# EAGLE board espduino-12-panel (EAGLE 7.1.0), part 1 of 2
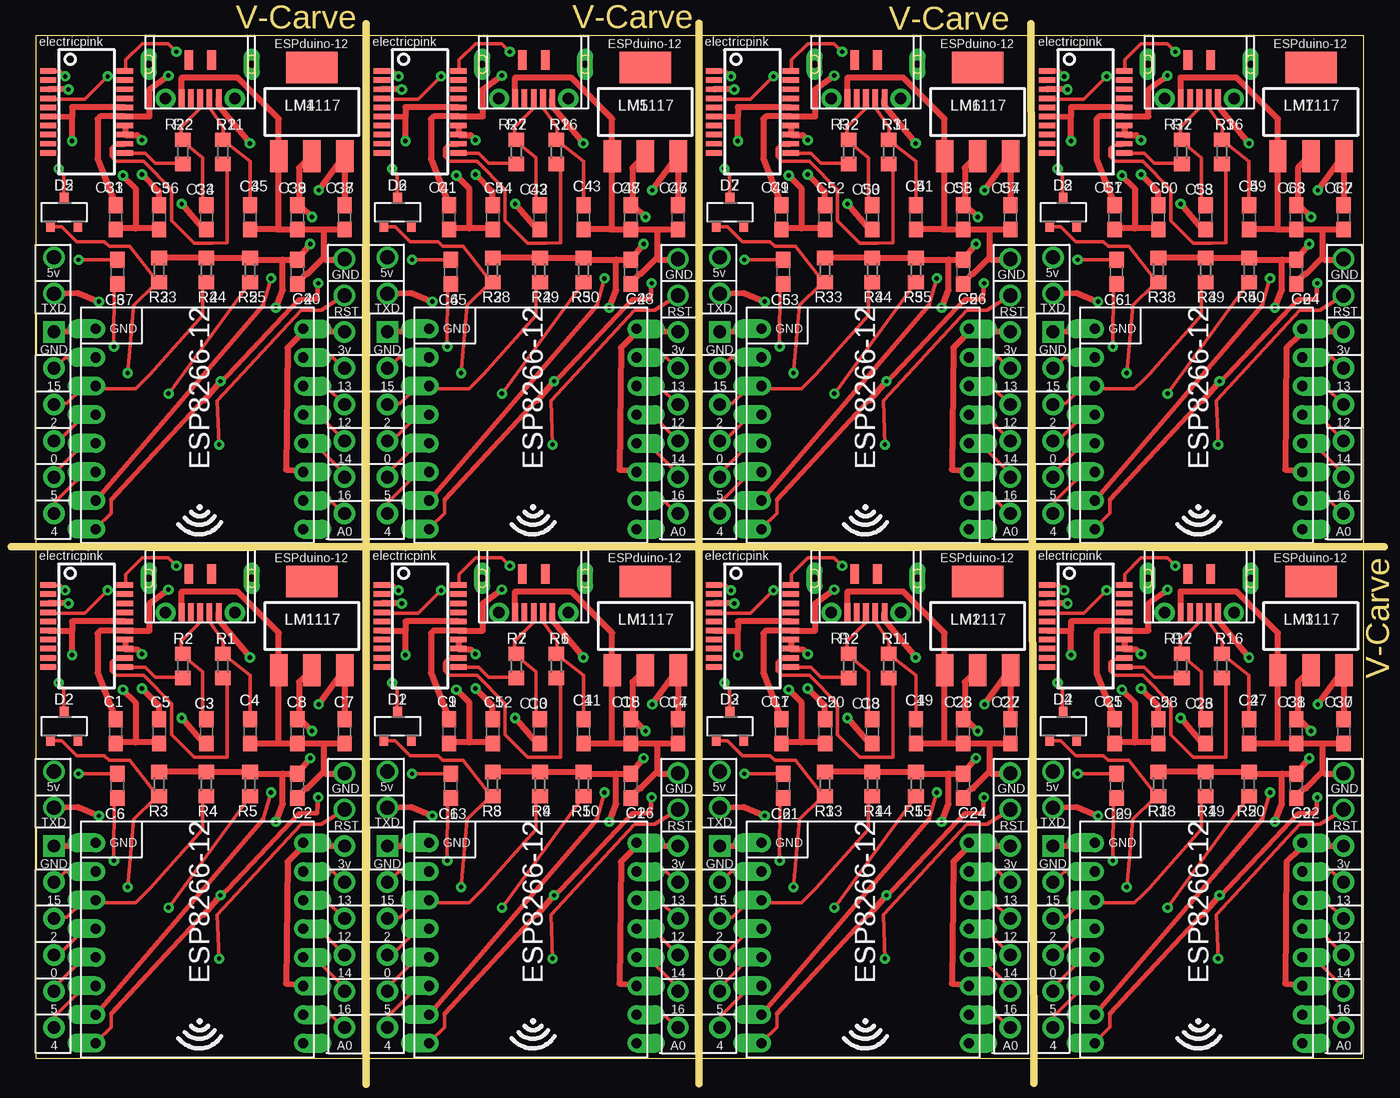
[diagram p0: board, top side]
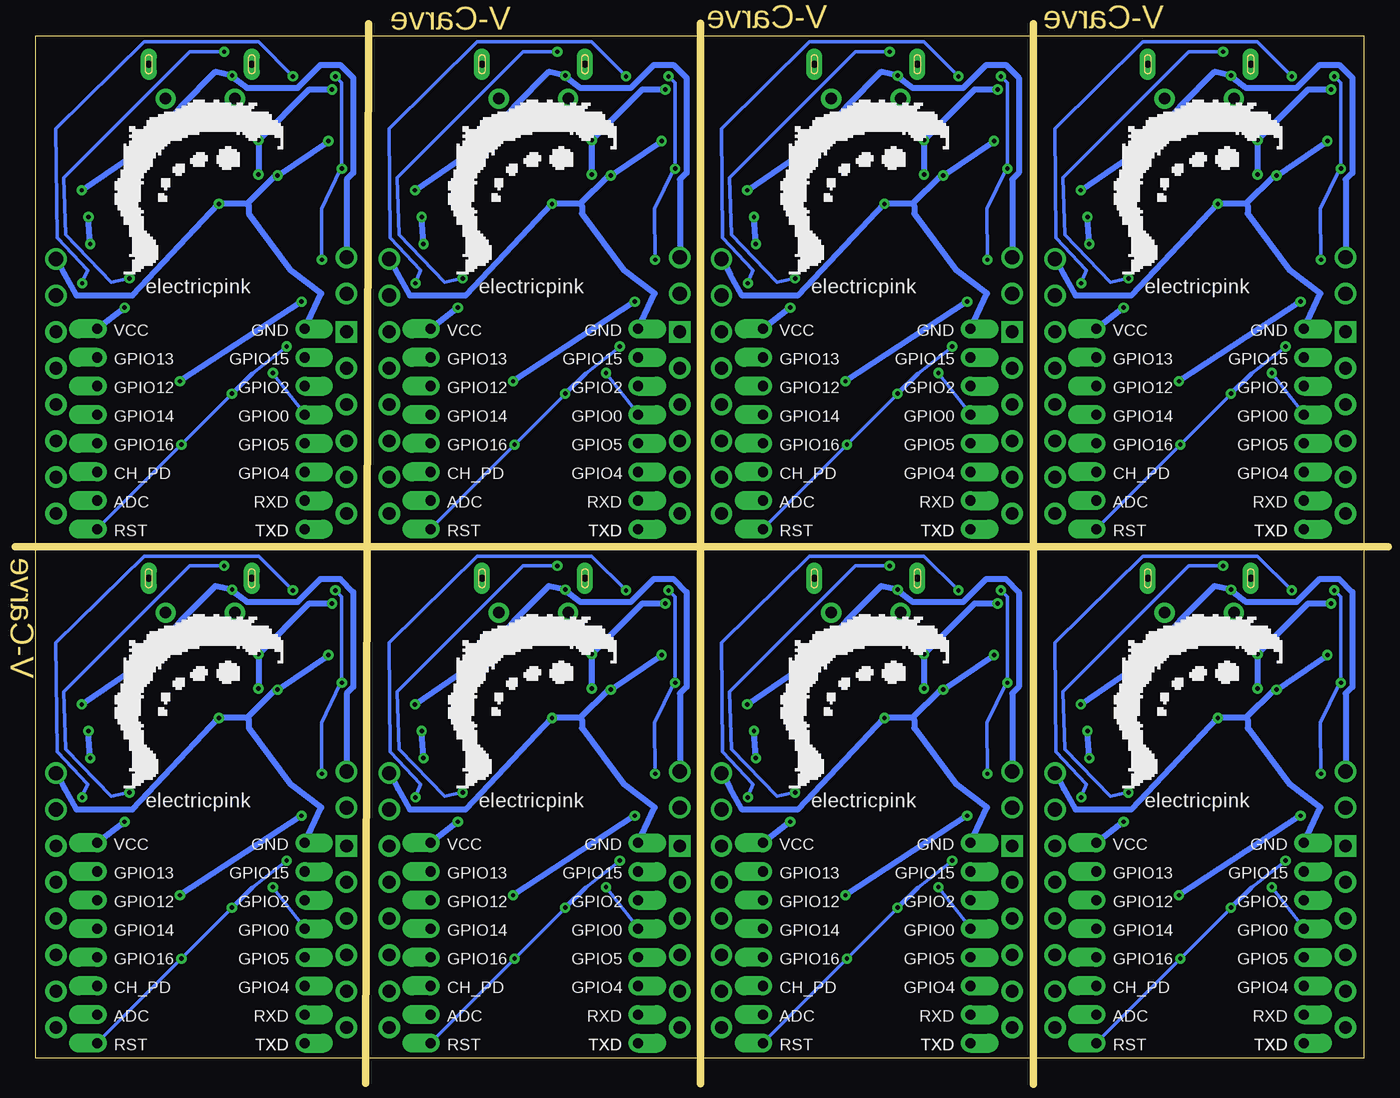
[diagram p1: board, bottom side, seen from below]

Size 92.84 x 71.48 mm. Coordinates in mm from the lower left corner, seen from the top.
Outline: 0,0 92.84,0 92.84,71.48 0,71.48 0,0
Copper layers (1*16): Top 0.035mm / dielectric 1.5mm / Bottom 0.035mm
Design rules "SeeedStudio_2layer_conservative": minimum track width 8mil, minimum drill 12mil, track to track 8mil, track to pad 8mil, pad to pad 8mil, via to via 8mil, smd to smd 0mil, copper to edge 12mil, drill to drill 12mil, minimum pad ring 12mil, minimum via ring 8mil, stop-mask expansion 2mil, vias tented up to drill 100mil, thermal gap 12mil
Net classes: 0 default: width 0.254 mm; 1 POWER: width 0.406 mm
Milling: 4 lines

## Footprints (pad centres in the part's own frame; a part is rotated, then mirrored left to right if it is on the bottom)
C0603 = smd 1.1 x 1: 1 -0.85,0; 2 0.85,0
SOT23-R = smd 0.6 x 0.7: 1 -0.95,-1; 2 0.95,-1; 3 0,1
ESP8266-12-EXT-HEADERS = drill 0.711 pad 1.2 offset: ADC 2.895,11.791; CH_PD 2.895,9.791; GND 17.395,-0.209; GPIO0 17.395,5.791; GPIO2 17.395,3.791; GPIO4 17.395,9.791; GPIO5 17.395,7.791; GPIO12 2.895,3.791; GPIO13 2.895,1.791; GPIO14 2.895,5.791; GPIO15 17.395,1.791; GPIO16 2.895,7.791; RESET 2.895,13.791; RX 17.395,11.791; TX 17.395,13.791; VCC 2.895,-0.209 | drill 0.889 pad 1.5: ADC_P 0,12.7; GPIO0_P 20.32,7.62; GPIO2_P 20.32,5.08; GPIO4_P 20.32,12.7; GPIO5_P 20.32,10.16; GPIO12_P 0,5.08; GPIO13_P 0,2.54; GPIO14_P 0,7.62; GPIO15_P 20.32,2.54; GPIO_16_P 0,10.16; VCC_P 0,0 | drill 0.889 pad 1.5 square: GND_P 20.32,0
SOT223 = smd 1.219 x 2.235: 1 -2.311,-3.099; 2 0,-3.099; 3 2.311,-3.099 | smd 3.6 x 2.2: 4 0,3.099
R0603 = smd 1 x 1.1: 1 -0.85,0; 2 0.85,0
SSOP20_L = smd 0.381 x 1.143: 1 -2.857,-2.68; 2 -2.223,-2.68; 3 -1.587,-2.68; 4 -0.953,-2.68; 5 -0.318,-2.68; 6 0.318,-2.68; 7 0.953,-2.68; 8 1.587,-2.68; 9 2.223,-2.68; 10 2.857,-2.68; 11 2.857,2.68; 12 2.223,2.68; 13 1.587,2.68; 14 0.953,2.68; 15 0.318,2.68; 16 -0.318,2.68; 17 -0.953,2.68; 18 -1.587,2.68; 19 -2.223,2.68; 20 -2.857,2.68
MICRO-USB-A01SB141B1 = smd 0.4 x 1.25: D+ 0,-4.375; D- 0.65,-4.375; GND -1.3,-4.375; ID -0.65,-4.375; VCC 1.3,-4.375 | smd 0.6 x 1.35: P$1 -0.8,-1.7; P$2 0.8,-1.7 | drill 0.8: P$8 -2.425,-4.4; P$9 2.425,-4.4 | drill 0.5 pad 1.1 long: P$10 -3.6,-2; P$12 3.6,-2

## Placement (x,y rotation side)
C1  4.7uF  [C0603]  5.59,22.86 270 top
C2  10uF  [C0603]  18.29,19.05 270 top
C3  47pF  [C0603]  11.94,22.86 270 top
C4  47pF  [C0603]  14.99,22.86 270 top
C5  0.1uF  [C0603]  8.64,22.86 270 top
C6  0.1uf  [C0603]  5.71,19.05 90 top
C7  0.1uf  [C0603]  21.59,22.86 270 top
C8  0.1uf  [C0603]  18.29,22.86 270 top
C9  4.7uF  [C0603]  28.9,22.86 270 top
C10  47pF  [C0603]  35.25,22.86 270 top
C11  47pF  [C0603]  38.3,22.86 270 top
C12  0.1uF  [C0603]  31.95,22.86 270 top
C13  0.1uf  [C0603]  29.02,19.05 90 top
C14  0.1uf  [C0603]  44.9,22.86 270 top
C15  0.1uf  [C0603]  41.6,22.86 270 top
C16  10uF  [C0603]  41.6,19.05 270 top
C17  4.7uF  [C0603]  52.13,22.86 270 top
C18  47pF  [C0603]  58.48,22.86 270 top
C19  47pF  [C0603]  61.53,22.86 270 top
C20  0.1uF  [C0603]  55.18,22.86 270 top
C21  0.1uf  [C0603]  52.26,19.05 90 top
C22  0.1uf  [C0603]  68.14,22.86 270 top
C23  0.1uf  [C0603]  64.83,22.86 270 top
C24  10uF  [C0603]  64.83,19.05 270 top
C25  4.7uF  [C0603]  75.43,22.86 270 top
C26  47pF  [C0603]  81.78,22.86 270 top
C27  47pF  [C0603]  84.83,22.86 270 top
C28  0.1uF  [C0603]  78.48,22.86 270 top
C29  0.1uf  [C0603]  75.56,19.05 90 top
C30  0.1uf  [C0603]  91.43,22.86 270 top
C31  0.1uf  [C0603]  88.13,22.86 270 top
C32  10uF  [C0603]  88.13,19.05 270 top
C33  4.7uF  [C0603]  5.59,58.78 270 top
C34  47pF  [C0603]  11.94,58.78 270 top
C35  47pF  [C0603]  14.99,58.78 270 top
C36  0.1uF  [C0603]  8.64,58.78 270 top
C37  0.1uf  [C0603]  5.71,54.97 90 top
C38  0.1uf  [C0603]  21.59,58.78 270 top
C39  0.1uf  [C0603]  18.29,58.78 270 top
C40  10uF  [C0603]  18.29,54.97 270 top
C41  4.7uF  [C0603]  28.9,58.78 270 top
C42  47pF  [C0603]  35.25,58.78 270 top
C43  47pF  [C0603]  38.3,58.78 270 top
C44  0.1uF  [C0603]  31.95,58.78 270 top
C45  0.1uf  [C0603]  29.02,54.97 90 top
C46  0.1uf  [C0603]  44.9,58.78 270 top
C47  0.1uf  [C0603]  41.6,58.78 270 top
C48  10uF  [C0603]  41.6,54.97 270 top
C49  4.7uF  [C0603]  52.13,58.78 270 top
C50  47pF  [C0603]  58.48,58.78 270 top
C51  47pF  [C0603]  61.53,58.78 270 top
C52  0.1uF  [C0603]  55.18,58.78 270 top
C53  0.1uf  [C0603]  52.26,54.97 90 top
C54  0.1uf  [C0603]  68.14,58.78 270 top
C55  0.1uf  [C0603]  64.83,58.78 270 top
C56  10uF  [C0603]  64.83,54.97 270 top
C57  4.7uF  [C0603]  75.43,58.78 270 top
C58  47pF  [C0603]  81.78,58.78 270 top
C59  47pF  [C0603]  84.83,58.78 270 top
C60  0.1uF  [C0603]  78.48,58.78 270 top
C61  0.1uf  [C0603]  75.56,54.97 90 top
C62  0.1uf  [C0603]  91.43,58.78 270 top
C63  0.1uf  [C0603]  88.13,58.78 270 top
C64  10uF  [C0603]  88.13,54.97 270 top
D1  [SOT23-R]  25.3,23.22 0 top
D2  [SOT23-R]  1.99,23.22 0 top
D3  [SOT23-R]  48.53,23.22 0 top
D4  [SOT23-R]  71.83,23.22 0 top
D5  [SOT23-R]  1.99,59.14 0 top
D6  [SOT23-R]  25.3,59.14 0 top
D7  [SOT23-R]  48.53,59.14 0 top
D8  [SOT23-R]  71.83,59.14 0 top
ESP8266-1  ESP8266-12ESP8266-BREAKOUT  [ESP8266-12-EXT-HEADERS]  44.9,14.86 180 top
ESP8266-2  ESP8266-12ESP8266-BREAKOUT  [ESP8266-12-EXT-HEADERS]  68.14,14.86 180 top
ESP8266-3  ESP8266-12ESP8266-BREAKOUT  [ESP8266-12-EXT-HEADERS]  91.43,14.86 180 top
ESP8266-4  ESP8266-12ESP8266-BREAKOUT  [ESP8266-12-EXT-HEADERS]  21.59,50.78 180 top
ESP8266-5  ESP8266-12ESP8266-BREAKOUT  [ESP8266-12-EXT-HEADERS]  44.9,50.78 180 top
ESP8266-6  ESP8266-12ESP8266-BREAKOUT  [ESP8266-12-EXT-HEADERS]  68.14,50.78 180 top
ESP8266-7  ESP8266-12ESP8266-BREAKOUT  [ESP8266-12-EXT-HEADERS]  91.43,50.78 180 top
ESP8266-12  ESP8266-12ESP8266-BREAKOUT  [ESP8266-12-EXT-HEADERS]  21.59,14.86 180 top
LM1  [SOT223]  42.61,30.23 0 top
LM2  [SOT223]  65.85,30.23 0 top
LM3  [SOT223]  89.15,30.23 0 top
LM4  [SOT223]  19.3,66.15 0 top
LM5  [SOT223]  42.61,66.15 0 top
LM6  [SOT223]  65.85,66.15 0 top
LM7  [SOT223]  89.15,66.15 0 top
LM1117  [SOT223]  19.3,30.23 0 top
R1  27  [R0603]  13.08,27.43 270 top
R2  27  [R0603]  10.29,27.43 90 top
R3  10k  [R0603]  8.64,19.18 90 top
R4  10k  [R0603]  11.94,19.18 90 top
R5  10k  [R0603]  14.99,19.18 90 top
R6  27  [R0603]  36.39,27.43 270 top
R7  27  [R0603]  33.6,27.43 90 top
R8  10k  [R0603]  31.95,19.18 90 top
R9  10k  [R0603]  35.25,19.18 90 top
R10  10k  [R0603]  38.3,19.18 90 top
R11  27  [R0603]  59.63,27.43 270 top
R12  27  [R0603]  56.83,27.43 90 top
R13  10k  [R0603]  55.18,19.18 90 top
R14  10k  [R0603]  58.48,19.18 90 top
R15  10k  [R0603]  61.53,19.18 90 top
R16  27  [R0603]  82.92,27.43 270 top
R17  27  [R0603]  80.13,27.43 90 top
R18  10k  [R0603]  78.48,19.18 90 top
R19  10k  [R0603]  81.78,19.18 90 top
R20  10k  [R0603]  84.83,19.18 90 top
R21  27  [R0603]  13.08,63.36 270 top
R22  27  [R0603]  10.29,63.36 90 top
R23  10k  [R0603]  8.64,55.1 90 top
R24  10k  [R0603]  11.94,55.1 90 top
R25  10k  [R0603]  14.99,55.1 90 top
R26  27  [R0603]  36.39,63.36 270 top
R27  27  [R0603]  33.6,63.36 90 top
R28  10k  [R0603]  31.95,55.1 90 top
R29  10k  [R0603]  35.25,55.1 90 top
R30  10k  [R0603]  38.3,55.1 90 top
R31  27  [R0603]  59.63,63.36 270 top
R32  27  [R0603]  56.83,63.36 90 top
R33  10k  [R0603]  55.18,55.1 90 top
R34  10k  [R0603]  58.48,55.1 90 top
R35  10k  [R0603]  61.53,55.1 90 top
R36  27  [R0603]  82.92,63.36 270 top
R37  27  [R0603]  80.13,63.36 90 top
R38  10k  [R0603]  78.48,55.1 90 top
R39  10k  [R0603]  81.78,55.1 90 top
R40  10k  [R0603]  84.83,55.1 90 top
U1  FT231XS  [SSOP20_L]  3.56,30.23 270 top
U2  [MICRO-USB-A01SB141B1]  11.5,35.56 0 top
U3  FT231XS  [SSOP20_L]  26.87,30.23 270 top
U4  [MICRO-USB-A01SB141B1]  34.81,35.56 0 top
U5  FT231XS  [SSOP20_L]  50.1,30.23 270 top
U6  [MICRO-USB-A01SB141B1]  58.05,35.56 0 top
U7  FT231XS  [SSOP20_L]  73.4,30.23 270 top
U8  [MICRO-USB-A01SB141B1]  81.34,35.56 0 top
U9  FT231XS  [SSOP20_L]  3.56,66.15 270 top
U10  [MICRO-USB-A01SB141B1]  11.5,71.48 0 top
U11  FT231XS  [SSOP20_L]  26.87,66.15 270 top
U12  [MICRO-USB-A01SB141B1]  34.81,71.48 0 top
U13  FT231XS  [SSOP20_L]  50.1,66.15 270 top
U14  [MICRO-USB-A01SB141B1]  58.05,71.48 0 top
U15  FT231XS  [SSOP20_L]  73.4,66.15 270 top
U16  [MICRO-USB-A01SB141B1]  81.34,71.48 0 top
U$1  [JUMPER-LOGO-X-SMALL]  36.01,27.3 0 top
U$2  [JUMPER-LOGO-X-SMALL]  12.7,27.3 0 top
U$3  [JUMPER-LOGO-X-SMALL]  59.24,27.3 0 top
U$4  [JUMPER-LOGO-X-SMALL]  82.54,27.3 0 top
U$5  [JUMPER-LOGO-X-SMALL]  12.7,63.23 0 top
U$6  [JUMPER-LOGO-X-SMALL]  36.01,63.23 0 top
U$7  [JUMPER-LOGO-X-SMALL]  59.24,63.23 0 top
U$8  [JUMPER-LOGO-X-SMALL]  82.54,63.23 0 top

## Library data of the parts
C1-C64 R1-R40 = resistor
D1-D8 = adafruit
ESP8266-1-ESP8266-7 ESP8266-12 U2 U4 U6 U8 U10 U12 U14 U16 U$1-U$8 = jumper-parts
LM1-LM7 LM1117 = SparkFun-PowerIC; PROD_ID: VREG-08170
U1 U3 U5 U7 U9 U11 U13 U15 = SparkFun-DigitalIC

## Nets
3.3V [POWER]: C2.1 C8.1 ESP8266-12.CH_PD ESP8266-12.VCC ESP8266-12.VCC_P LM1117.2 R3.2 R4.2 R5.2
3.3V1 [POWER]: C15.1 C16.1 ESP8266-1.CH_PD ESP8266-1.VCC ESP8266-1.VCC_P LM1.2 R8.2 R9.2 R10.2
3.3V2 [POWER]: C23.1 C24.1 ESP8266-2.CH_PD ESP8266-2.VCC ESP8266-2.VCC_P LM2.2 R13.2 R14.2 R15.2
3.3V3 [POWER]: C31.1 C32.1 ESP8266-3.CH_PD ESP8266-3.VCC ESP8266-3.VCC_P LM3.2 R18.2 R19.2 R20.2
3.3V4 [POWER]: C39.1 C40.1 ESP8266-4.CH_PD ESP8266-4.VCC ESP8266-4.VCC_P LM4.2 R23.2 R24.2 R25.2
3.3V5 [POWER]: C47.1 C48.1 ESP8266-5.CH_PD ESP8266-5.VCC ESP8266-5.VCC_P LM5.2 R28.2 R29.2 R30.2
3.3V6 [POWER]: C55.1 C56.1 ESP8266-6.CH_PD ESP8266-6.VCC ESP8266-6.VCC_P LM6.2 R33.2 R34.2 R35.2
3.3V7 [POWER]: C63.1 C64.1 ESP8266-7.CH_PD ESP8266-7.VCC ESP8266-7.VCC_P LM7.2 R38.2 R39.2 R40.2
5V [POWER]: C1.1 C7.1 LM1117.3 U1.15 U2.VCC
5V1 [POWER]: C9.1 C14.1 LM1.3 U3.15 U4.VCC
5V2 [POWER]: C17.1 C22.1 LM2.3 U5.15 U6.VCC
5V3 [POWER]: C25.1 C30.1 LM3.3 U7.15 U8.VCC
5V4 [POWER]: C33.1 C38.1 LM4.3 U9.15 U10.VCC
5V5 [POWER]: C41.1 C46.1 LM5.3 U11.15 U12.VCC
5V6 [POWER]: C49.1 C54.1 LM6.3 U13.15 U14.VCC
5V7 [POWER]: C57.1 C62.1 LM7.3 U15.15 U16.VCC
ADC: ESP8266-12.ADC ESP8266-12.ADC_P
ADC1: ESP8266-1.ADC ESP8266-1.ADC_P
ADC2: ESP8266-2.ADC ESP8266-2.ADC_P
ADC3: ESP8266-3.ADC ESP8266-3.ADC_P
ADC4: ESP8266-4.ADC ESP8266-4.ADC_P
ADC5: ESP8266-5.ADC ESP8266-5.ADC_P
ADC6: ESP8266-6.ADC ESP8266-6.ADC_P
ADC7: ESP8266-7.ADC ESP8266-7.ADC_P
CBUS0: U1.18
CBUS1: U3.19
CBUS2: U3.18
CBUS3: U1.19
CBUS4: U5.19
CBUS5: U5.18
CBUS6: U7.19
CBUS7: U7.18
CBUS8: U9.19
CBUS9: U9.18
CBUS10: U11.19
CBUS11: U11.18
CBUS12: U13.19
CBUS13: U13.18
CBUS14: U15.19
CBUS15: U15.18
CTS: U1.9
CTS1: U3.9
CTS2: U5.9
CTS3: U7.9
CTS4: U9.9
CTS5: U11.9
CTS6: U13.9
CTS7: U15.9
DCD: U1.8
DCD1: U3.8
DCD2: U5.8
DCD3: U7.8
DCD4: U9.8
DCD5: U11.8
DCD6: U13.8
DCD7: U15.8
DSR: U1.7
DSR1: U3.7
DSR2: U5.7
DSR3: U7.7
DSR4: U9.7
DSR5: U11.7
DSR6: U13.7
DSR7: U15.7
DTR: C6.2 D2.3 U1.1
DTR1: C13.2 D1.3 U3.1
DTR2: C21.2 D3.3 U5.1
DTR3: C29.2 D4.3 U7.1
DTR4: C37.2 D5.3 U9.1
DTR5: C45.2 D6.3 U11.1
DTR6: C53.2 D7.3 U13.1
DTR7: C61.2 D8.3 U15.1
GND [POWER]: C1.2 C2.2 C3.2 C4.2 C5.2 C7.2 C8.2 ESP8266-12.GND ESP8266-12.GND_P LM1117.1 U1.6 U1.16 U2.GND
GND1 [POWER]: C9.2 C10.2 C11.2 C12.2 C14.2 C15.2 C16.2 ESP8266-1.GND ESP8266-1.GND_P LM1.1 U3.6 U3.16 U4.GND
GND2 [POWER]: C17.2 C18.2 C19.2 C20.2 C22.2 C23.2 C24.2 ESP8266-2.GND ESP8266-2.GND_P LM2.1 U5.6 U5.16 U6.GND
GND3 [POWER]: C25.2 C26.2 C27.2 C28.2 C30.2 C31.2 C32.2 ESP8266-3.GND ESP8266-3.GND_P LM3.1 U7.6 U7.16 U8.GND
GND4 [POWER]: C33.2 C34.2 C35.2 C36.2 C38.2 C39.2 C40.2 ESP8266-4.GND ESP8266-4.GND_P LM4.1 U9.6 U9.16 U10.GND
GND5 [POWER]: C41.2 C42.2 C43.2 C44.2 C46.2 C47.2 C48.2 ESP8266-5.GND ESP8266-5.GND_P LM5.1 U11.6 U11.16 U12.GND
GND6 [POWER]: C49.2 C50.2 C51.2 C52.2 C54.2 C55.2 C56.2 ESP8266-6.GND ESP8266-6.GND_P LM6.1 U13.6 U13.16 U14.GND
GND7 [POWER]: C57.2 C58.2 C59.2 C60.2 C62.2 C63.2 C64.2 ESP8266-7.GND ESP8266-7.GND_P LM7.1 U15.6 U15.16 U16.GND
GPIO0: D2.1 ESP8266-12.GPIO0 ESP8266-12.GPIO0_P R3.1
GPIO1: D1.1 ESP8266-1.GPIO0 ESP8266-1.GPIO0_P R8.1
GPIO2: ESP8266-12.GPIO2 ESP8266-12.GPIO2_P R4.1
GPIO3: ESP8266-1.GPIO2 ESP8266-1.GPIO2_P R9.1
GPIO4: ESP8266-12.GPIO4 ESP8266-12.GPIO4_P
GPIO5: ESP8266-12.GPIO5 ESP8266-12.GPIO5_P
GPIO6: ESP8266-1.GPIO16 ESP8266-1.GPIO_16_P
GPIO7: ESP8266-1.GPIO14 ESP8266-1.GPIO14_P
GPIO8: ESP8266-1.GPIO12 ESP8266-1.GPIO12_P
GPIO9: ESP8266-1.GPIO13 ESP8266-1.GPIO13_P
GPIO10: ESP8266-1.GPIO4 ESP8266-1.GPIO4_P
GPIO11: ESP8266-1.GPIO5 ESP8266-1.GPIO5_P
GPIO12: ESP8266-12.GPIO12 ESP8266-12.GPIO12_P
GPIO13: ESP8266-12.GPIO13 ESP8266-12.GPIO13_P
GPIO14: ESP8266-12.GPIO14 ESP8266-12.GPIO14_P
GPIO15: ESP8266-12.GPIO15 ESP8266-12.GPIO15_P
GPIO16: ESP8266-12.GPIO16 ESP8266-12.GPIO_16_P
GPIO17: ESP8266-1.GPIO15 ESP8266-1.GPIO15_P
GPIO18: D3.1 ESP8266-2.GPIO0 ESP8266-2.GPIO0_P R13.1
GPIO19: ESP8266-2.GPIO2 ESP8266-2.GPIO2_P R14.1
GPIO20: ESP8266-2.GPIO16 ESP8266-2.GPIO_16_P
GPIO21: ESP8266-2.GPIO14 ESP8266-2.GPIO14_P
GPIO22: ESP8266-2.GPIO12 ESP8266-2.GPIO12_P
GPIO23: ESP8266-2.GPIO13 ESP8266-2.GPIO13_P
GPIO24: ESP8266-2.GPIO4 ESP8266-2.GPIO4_P
GPIO25: ESP8266-2.GPIO5 ESP8266-2.GPIO5_P
GPIO26: ESP8266-2.GPIO15 ESP8266-2.GPIO15_P
GPIO27: D4.1 ESP8266-3.GPIO0 ESP8266-3.GPIO0_P R18.1
GPIO28: ESP8266-3.GPIO2 ESP8266-3.GPIO2_P R19.1
GPIO29: ESP8266-3.GPIO16 ESP8266-3.GPIO_16_P
GPIO30: ESP8266-3.GPIO14 ESP8266-3.GPIO14_P
GPIO31: ESP8266-3.GPIO12 ESP8266-3.GPIO12_P
GPIO32: ESP8266-3.GPIO13 ESP8266-3.GPIO13_P
GPIO33: ESP8266-3.GPIO4 ESP8266-3.GPIO4_P
GPIO34: ESP8266-3.GPIO5 ESP8266-3.GPIO5_P
GPIO35: ESP8266-3.GPIO15 ESP8266-3.GPIO15_P
GPIO36: D5.1 ESP8266-4.GPIO0 ESP8266-4.GPIO0_P R23.1
GPIO37: ESP8266-4.GPIO2 ESP8266-4.GPIO2_P R24.1
GPIO38: ESP8266-4.GPIO16 ESP8266-4.GPIO_16_P
GPIO39: ESP8266-4.GPIO14 ESP8266-4.GPIO14_P
GPIO40: ESP8266-4.GPIO12 ESP8266-4.GPIO12_P
GPIO41: ESP8266-4.GPIO13 ESP8266-4.GPIO13_P
GPIO42: ESP8266-4.GPIO4 ESP8266-4.GPIO4_P
GPIO43: ESP8266-4.GPIO5 ESP8266-4.GPIO5_P
GPIO44: ESP8266-4.GPIO15 ESP8266-4.GPIO15_P
GPIO45: D6.1 ESP8266-5.GPIO0 ESP8266-5.GPIO0_P R28.1
GPIO46: ESP8266-5.GPIO2 ESP8266-5.GPIO2_P R29.1
GPIO47: ESP8266-5.GPIO16 ESP8266-5.GPIO_16_P
GPIO48: ESP8266-5.GPIO14 ESP8266-5.GPIO14_P
GPIO49: ESP8266-5.GPIO12 ESP8266-5.GPIO12_P
GPIO50: ESP8266-5.GPIO13 ESP8266-5.GPIO13_P
GPIO51: ESP8266-5.GPIO4 ESP8266-5.GPIO4_P
GPIO52: ESP8266-5.GPIO5 ESP8266-5.GPIO5_P
GPIO53: ESP8266-5.GPIO15 ESP8266-5.GPIO15_P
GPIO54: D7.1 ESP8266-6.GPIO0 ESP8266-6.GPIO0_P R33.1
GPIO55: ESP8266-6.GPIO2 ESP8266-6.GPIO2_P R34.1
GPIO56: ESP8266-6.GPIO16 ESP8266-6.GPIO_16_P
GPIO57: ESP8266-6.GPIO14 ESP8266-6.GPIO14_P
GPIO58: ESP8266-6.GPIO12 ESP8266-6.GPIO12_P
GPIO59: ESP8266-6.GPIO13 ESP8266-6.GPIO13_P
GPIO60: ESP8266-6.GPIO4 ESP8266-6.GPIO4_P
GPIO61: ESP8266-6.GPIO5 ESP8266-6.GPIO5_P
GPIO62: ESP8266-6.GPIO15 ESP8266-6.GPIO15_P
GPIO63: D8.1 ESP8266-7.GPIO0 ESP8266-7.GPIO0_P R38.1
GPIO64: ESP8266-7.GPIO2 ESP8266-7.GPIO2_P R39.1
GPIO65: ESP8266-7.GPIO16 ESP8266-7.GPIO_16_P
GPIO66: ESP8266-7.GPIO14 ESP8266-7.GPIO14_P
GPIO67: ESP8266-7.GPIO12 ESP8266-7.GPIO12_P
GPIO68: ESP8266-7.GPIO13 ESP8266-7.GPIO13_P
GPIO69: ESP8266-7.GPIO4 ESP8266-7.GPIO4_P
GPIO70: ESP8266-7.GPIO5 ESP8266-7.GPIO5_P
GPIO71: ESP8266-7.GPIO15 ESP8266-7.GPIO15_P
N$1: R1.2 U1.12
N$2: R2.1 U1.11
N$3: C3.1 R2.2 U2.D+
N$4: C4.1 R1.1 U2.D-
N$5 [POWER]: C5.1 U1.3 U1.13 U1.14
N$6: R6.2 U3.12
N$7: R7.1 U3.11
N$8: C10.1 R7.2 U4.D+
N$9: C11.1 R6.1 U4.D-
N$10 [POWER]: C12.1 U3.3 U3.13 U3.14
N$11: R11.2 U5.12
N$12: R12.1 U5.11
N$13: C18.1 R12.2 U6.D+
N$14: C19.1 R11.1 U6.D-
N$15 [POWER]: C20.1 U5.3 U5.13 U5.14
N$16: R16.2 U7.12
N$17: R17.1 U7.11
N$18: C26.1 R17.2 U8.D+
N$19: C27.1 R16.1 U8.D-
N$20 [POWER]: C28.1 U7.3 U7.13 U7.14
N$21: R21.2 U9.12
N$22: R22.1 U9.11
N$23: C34.1 R22.2 U10.D+
N$24: C35.1 R21.1 U10.D-
N$25 [POWER]: C36.1 U9.3 U9.13 U9.14
N$26: R26.2 U11.12
N$27: R27.1 U11.11
N$28: C42.1 R27.2 U12.D+
N$29: C43.1 R26.1 U12.D-
N$30 [POWER]: C44.1 U11.3 U11.13 U11.14
N$31: R31.2 U13.12
N$32: R32.1 U13.11
N$33: C50.1 R32.2 U14.D+
N$34: C51.1 R31.1 U14.D-
N$35 [POWER]: C52.1 U13.3 U13.13 U13.14
N$36: R36.2 U15.12
N$37: R37.1 U15.11
N$38: C58.1 R37.2 U16.D+
N$39: C59.1 R36.1 U16.D-
N$40 [POWER]: C60.1 U15.3 U15.13 U15.14
RESET: C6.1 ESP8266-12.RESET R5.1
RESET1: C13.1 ESP8266-1.RESET R10.1
RESET2: C21.1 ESP8266-2.RESET R15.1
RESET3: C29.1 ESP8266-3.RESET R20.1
RESET4: C37.1 ESP8266-4.RESET R25.1
RESET5: C45.1 ESP8266-5.RESET R30.1
RESET6: C53.1 ESP8266-6.RESET R35.1
RESET7: C61.1 ESP8266-7.RESET R40.1
RI: U1.5
RI1: U3.5
RI2: U5.5
RI3: U7.5
RI4: U9.5
RI5: U11.5
RI6: U13.5
RI7: U15.5
RTS: U1.2
RTS1: U3.2
RTS2: U5.2
RTS3: U7.2
RTS4: U9.2
RTS5: U11.2
RTS6: U13.2
RTS7: U15.2
RXD: ESP8266-12.RX U1.20
RXD1: ESP8266-1.RX U3.20
RXD2: ESP8266-2.RX U5.20
RXD3: ESP8266-3.RX U7.20
RXD4: ESP8266-4.RX U9.20
RXD5: ESP8266-5.RX U11.20
RXD6: ESP8266-6.RX U13.20
RXD7: ESP8266-7.RX U15.20
TXD: ESP8266-12.TX U1.4
TXD1: ESP8266-1.TX U3.4
TXD2: ESP8266-2.TX U5.4
TXD3: ESP8266-3.TX U7.4
TXD4: ESP8266-4.TX U9.4
TXD5: ESP8266-5.TX U11.4
TXD6: ESP8266-6.TX U13.4
TXD7: ESP8266-7.TX U15.4